# Altium PCB Lipo_Solar_Charger.PcbDoc
Units mil, origin at the board's own origin, x right, y up, seen from the top; angles counter-clockwise.
Board outline 1653.54 x 1653.54 mil, 2 copper layers (Top Layer, Bottom Layer); 28 components, 18 nets, 77 pads, 84 vias.
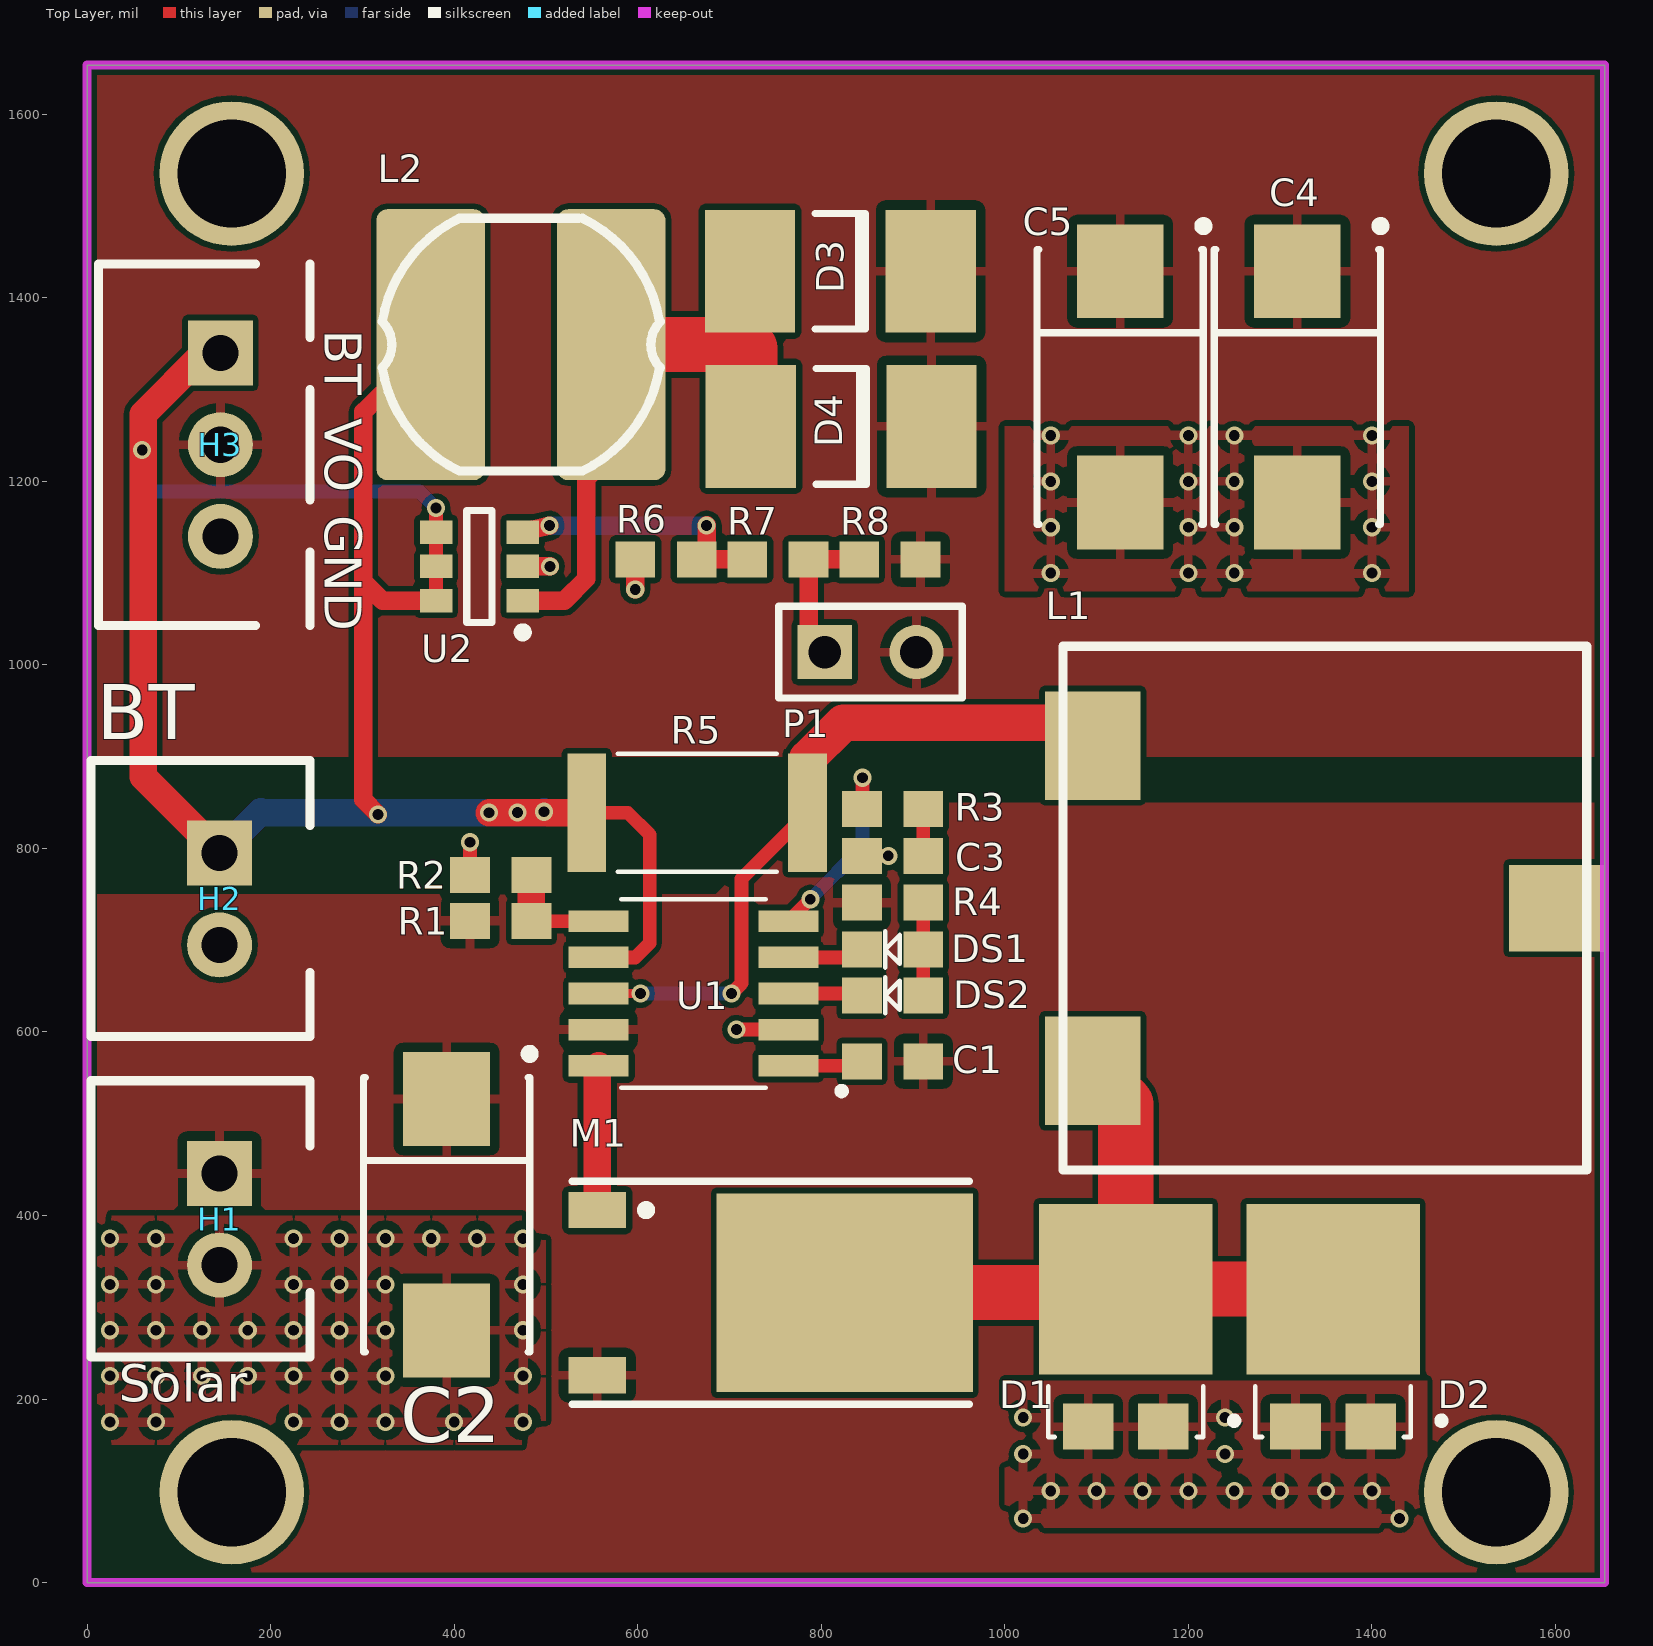
[diagram p0: Top Layer view]
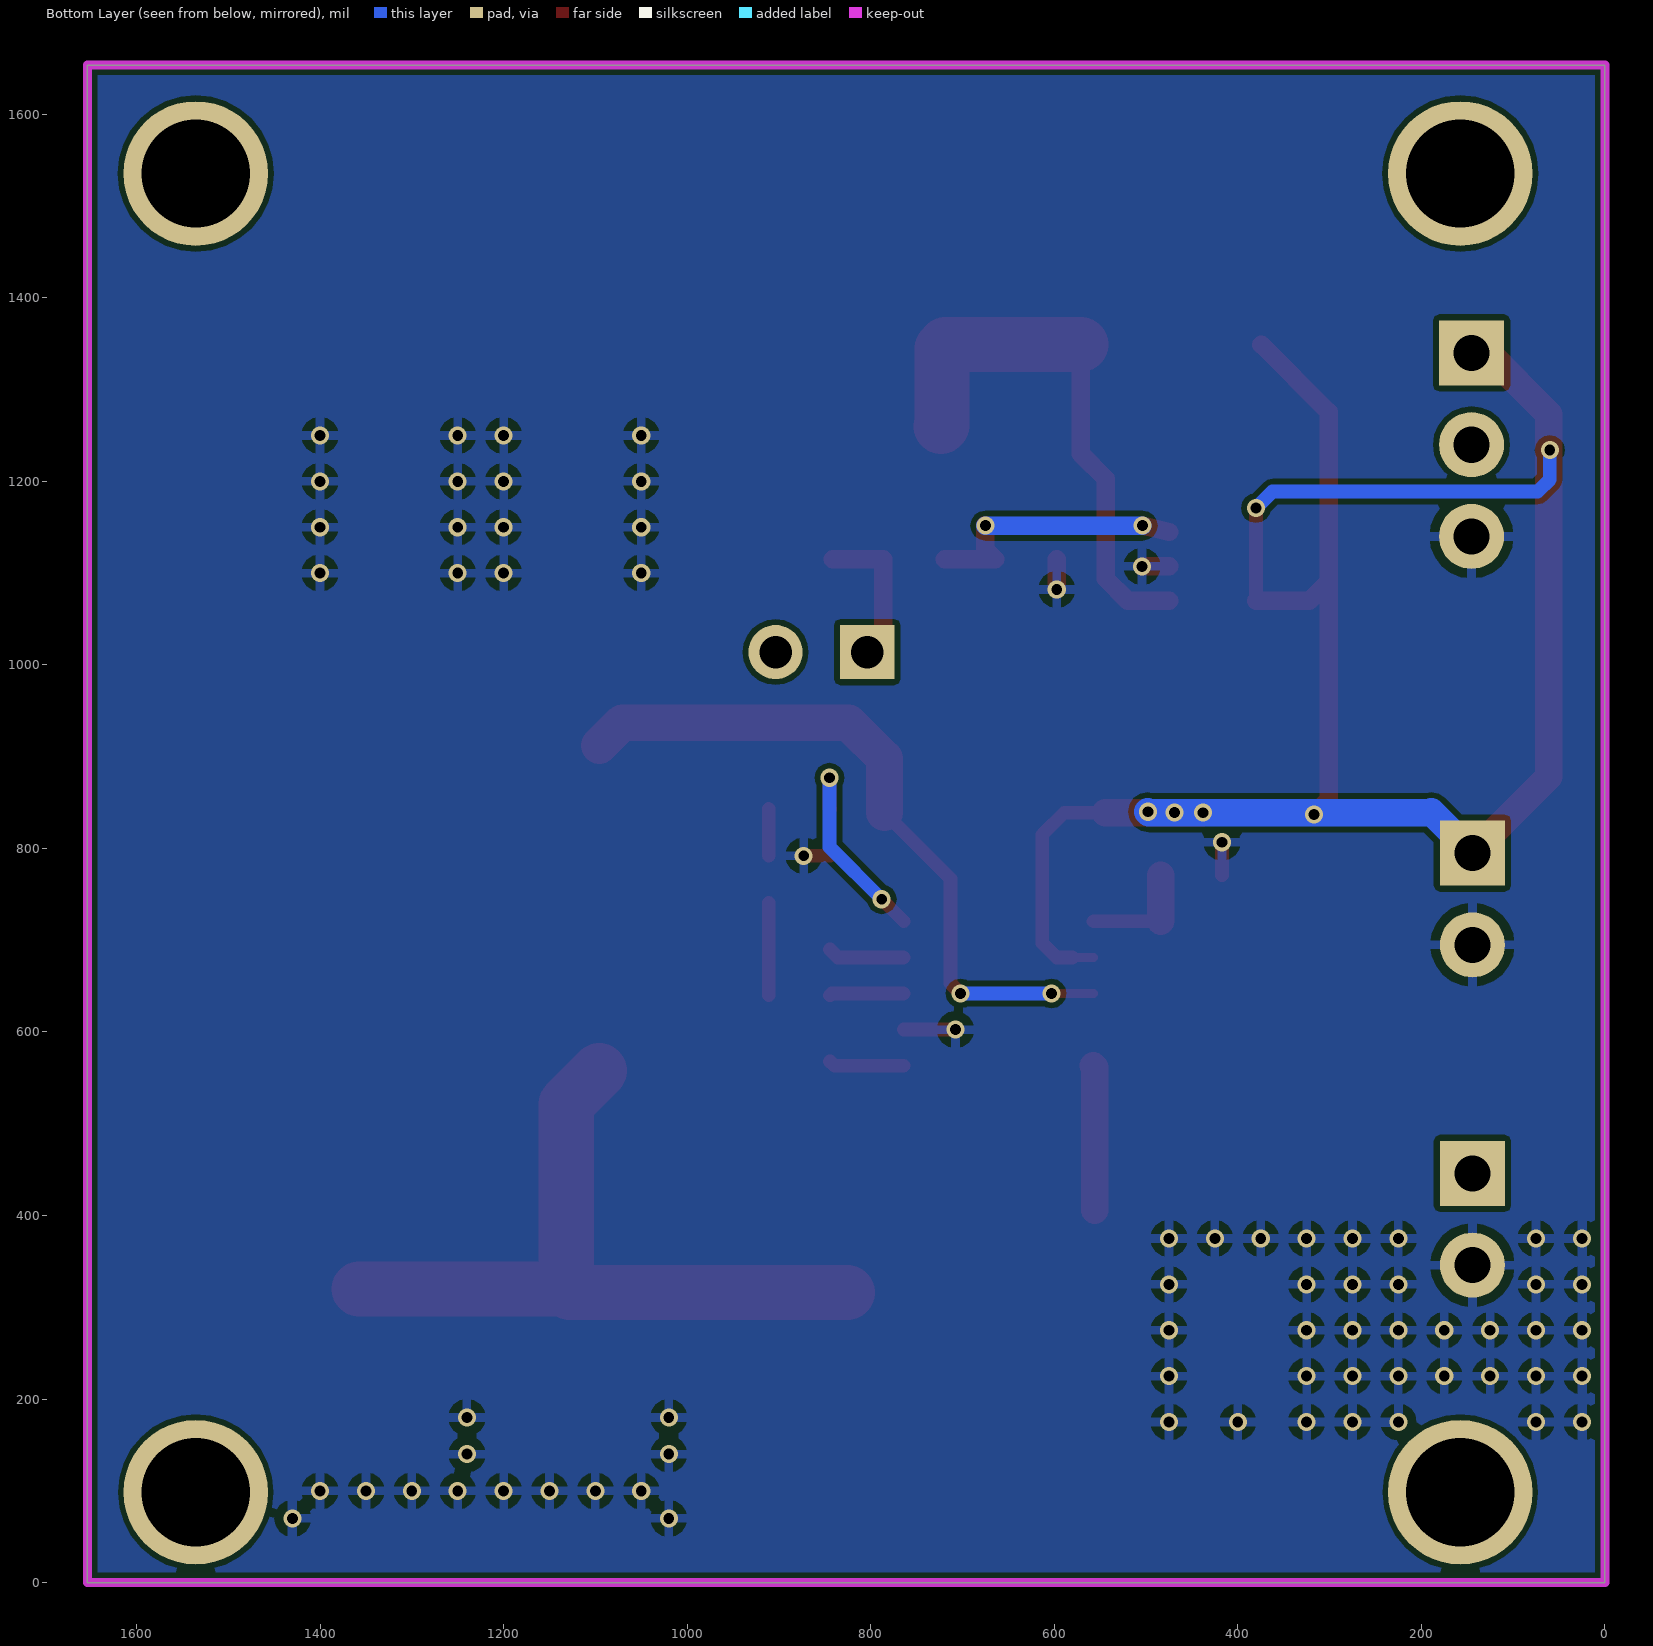
[diagram p1: Bottom Layer view, seen from below]
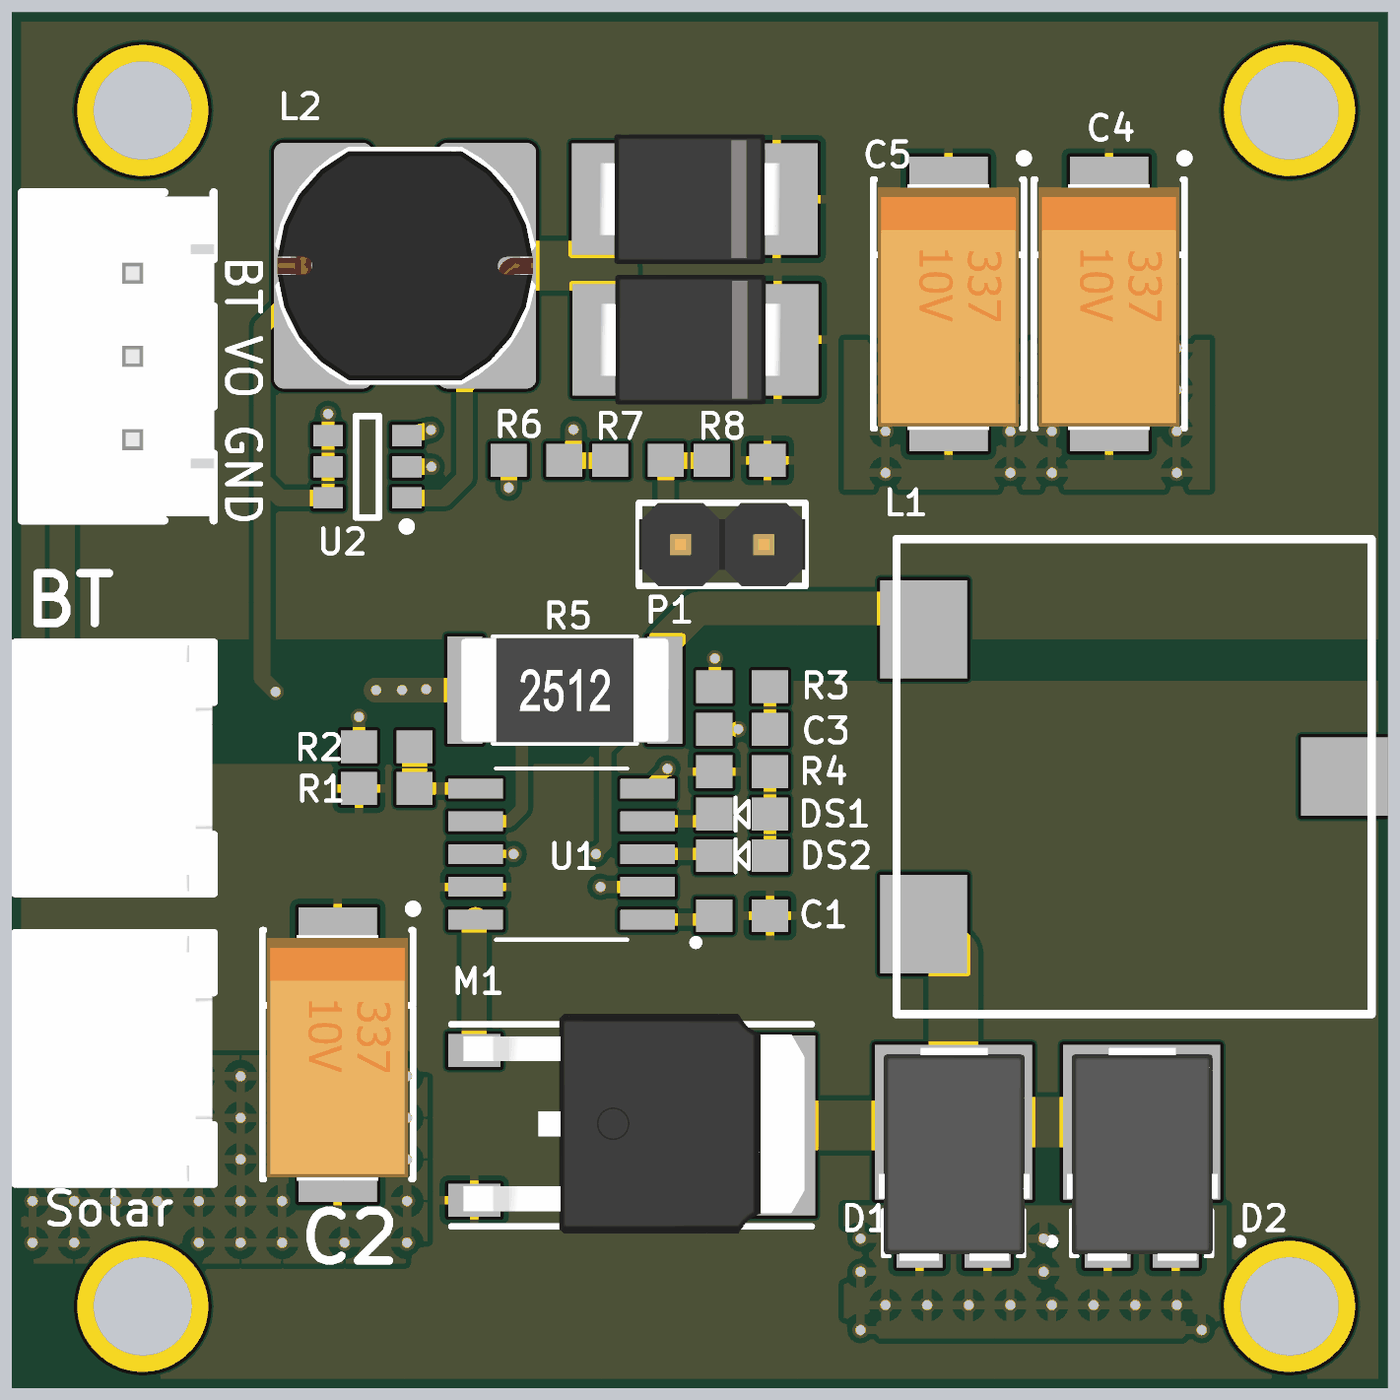
[diagram p2: 3D render of the assembled board from above, using the file's embedded part models]

## Layer stack, top to bottom
Top Solder: solder mask 0.4, Solder Resist, Dk 3.5
Top Layer: signal copper 1.4
Dielectric 1: dielectric 12.6, FR-4, Dk 4.8
Bottom Layer: signal copper 1.4
Bottom Solder: solder mask 0.4, Solder Resist, Dk 3.5

## Board outline
0,0 0,1653.54 1653.54,1653.54 1653.54,0

## Design rules (kind name [scope] priority, off if disabled: settings)
Clearance [All] p1: gap=6 ignorepadtopadclearanceinfootprint=FALSE
PolygonConnect [All] p1: connectstyle=Relief reliefconductorwidth=10 reliefentries=4 polygonreliefangle="90 Angle" airgapwidth=10
RoutingVias [All] p1: holewidth=28 width=50 viastyle="Through Hole" minholewidth=28 minwidth=50 maxholewidth=28 maxwidth=50
SolderMaskExpansion [All] p1: expansion=4
Width [All] p1: maxlimit=60 minlimit=6 preferedwidth=15
30 further rules are at their usual default settings.

## Components (designator, comment, footprint, x,y, rotation, side; value= is the part's Value field where it differs from the comment)
C1 "100nF" 0603 877.69,567.94 r0 top
C2 "16V 100uF" "7343 Tantalum Capacitor" 391.69,400.94 r270 top
C3 "220nF" 0603 877.69,791.94 r0 top
C4 "16V 100uF" "7343 Tantalum Capacitor" 1318.69,1302.94 r270 top
C5 "16V 100uF" "7343 Tantalum Capacitor" 1125.69,1302.94 r270 top
D1 "SB1045" TO-277 1131.75,278.8 r0 top
D2 "SB1045" TO-277 1357.64,278.8 r0 top
D3 "SS24" "SMD Diode SMB" 820.69,1428.94 r0 top
D4 "SS24" "SMD Diode SMB" 821.69,1259.94 r0 top
DS1 "LED" 0603_LED 877.69,689.94 r180 top
DS2 "LED" 0603_LED 877.69,639.94 r180 top
H1 "Solar" "XH2.54 2P" 144.32,395.94 r270 top
H2 "BT" "XH2.54 2P" 144.32,744.94 r270 top
H3 "XT2.54 3P" "XH2.54 3P" 145.31,1239.94 r270 top
L1 "12uH" CDEP147 1348.69,734.94 r180 top
L2 "10uH" CD75 472.69,1348.94 r90 top
M1 "AOD4185" TO-252AA 690.69,315.94 r270 top
P1 "12V/5V" HDR1X2 803.69,1013.94 r0 top
R1 "178kΩ" 1608[0603] 450.69,720.94 r180 top
R2 "45.3kΩ" 1608[0603] 450.69,770.94 r0 top
R3 "120Ω" 1608[0603] 877.69,842.94 r180 top
R4 "2kΩ" 1608[0603] 877.69,740.94 r180 top
R5 "40mΩ" 2512[6432] 664.69,838.94 r0 top
R6 "15kΩ" 1608[0603] 630.69,1114.94 r0 top
R7 "110kΩ" 1608[0603] 752.69,1114.94 r0 top
R8 "178kΩ" 1608[0603] 874.69,1114.94 r0 top
U1 "CN3791" SOIC100P600X175-10N 660.69,641.94 r180 top
U2 "MT3608" SOT23-6_L 427.45,1107.35 r180 top

## Footprints (in the part's own frame and the unit in brackets; to place one, negate y for a bottom-side part, rotate by r counter-clockwise, add the part's x,y. Pads: shape width x height; smd on the part's side, far side on the other; paste and mask are expansions set on the pad)
0603 [mm]
  rect 1.1x1 smd: 1(-0.85,0) 2(0.85,0)
  body extent -0.95,-0.4 0.95,0.4, height 0.5
0603_LED [mm]
  rect 1.1x1 smd: 1(-0.85,0) 2(0.85,0)
  silkscreen extent -0.2,-0.5 0.2,0.5, body extent -0.95,-0.4 0.95,0.4, height 0.5
1608[0603] [mm] "Chip Capacitor; Body 1.6 x 0.8 mm (LxW typ)"
  rect 1.1x1 smd: 1(-0.85,0) 2(0.85,0)
  body extent -0.95,-0.4 0.95,0.4, height 0.5
2512[6432] [mm]
  rect 1.07x3.27 smd: 1(-3.055,0) 2(3.055,0)
  silkscreen extent -2.2,-1.63 2.2,1.63, body extent -3.18,-1.59 3.17,1.59, height 0.62
"7343 Tantalum Capacitor" [mm] "Tantalum capacitor 2917 (7343 Metric)"
  rect 2.6x2.4 smd: 1(-3.2,0) 2(3.2,0)
  silkscreen extent -4.57,-2.3 3.8,2.43, body extent -3.66,-2.16 3.84,2.14, height 2.8
CD75 [mm]
  rrect20% 7.5x3 smd: 1(0,2.5) 2(0,-2.5)
  silkscreen extent -3.5,-3.86 3.5,3.84, body extent -3.5,-3.9 3.5,3.9, height 4.98
CDEP147 [mm] "SMD Power Inductor"
  rect 2.65x3 smd: 1(6.425,4.5) 2(6.425,-4.5)
  rect 2.65x2.4 smd: 3(-6.425,0)
  silkscreen extent -7.25,-7.25 7.25,7.25
HDR1X2 [mm] "Connector; Header; 2 Position"
  rect 1.5x1.5 hole 0.9: 1(0,0)
  round 1.5 hole 0.9: 2(2.54,0)
  silkscreen extent -1.27,-1.27 3.81,1.27, body extent -1.27,-1.27 3.81,1.27, height 8.6
"SMD Diode SMB" [mm]
  rect 2.5x3.4 smd: 1(-2.5,0) 2(2.5,0)
  silkscreen extent -0.7,-1.6 0.7,1.6, body extent -2.95,-1.97 2.65,1.97, height 2.65
SOIC100P600X175-10N [mm]
  rect 1.66x0.6 smd: 1(-2.625,2) 2(-2.625,1) 3(-2.625,0) 4(-2.625,-1) 5(-2.625,-2) 6(2.625,-2) 7(2.625,-1) 8(2.625,0) 9(2.625,1) 10(2.625,2)
  silkscreen extent -4.2,-2.61 2,2.8
SOT23-6_L [mm] "SOT23, 6-Leads, Body 2.9x1.6mm, Pitch 0.95mm, Lead Span 2.7mm, IPC High Density"
  rect 0.9x0.65 smd: 1(-1.2,0.95) 2(-1.2,0) 3(-1.2,-0.95) 4(1.2,-0.95) 5(1.2,0) 6(1.2,0.95)
  silkscreen extent -1.33,-1.55 0.35,1.95, body extent -0.9,-1.55 0.9,1.55, height 1.45
TO-252AA [mm] "D-PAK/TO-252-AA; 3 Leads (1 Cropped); Body 10.4 (inc. leads) x 6.7 mm (LxW max)"
  rect 1x1.6 smd: 1(-2.285,-3.425) 3(2.285,-3.425)
  rect 5.5x7.1 smd: 2(0,3.425)
  silkscreen extent -3.09,-4.13 3.09,6.88, body extent -3.41,-3.76 3.31,6.66, height 2.39
TO-277 [mm]
  rect 1.4x1.27 smd: 1(-1.04,-2.765) 1(1.04,-2.765)
  rect 4.8x4.72 smd: 2(0,1.04)
  silkscreen extent -2.15,-3.05 3.1,-1.65, body extent -2.28,-3.19 2.32,3.31, height 1.2
"XH2.54 2P" [mm]
  rect 1.8x1.8 hole 1: 1(-1.27,0)
  round 1.8 hole 1: 2(1.27,0)
  silkscreen extent -3.84,-3.56 3.81,2.5, body extent -3.75,-3.45 3.75,2.45, height 7
"XH2.54 3P" [mm]
  rect 1.8x1.8 hole 1: 1(-2.54,0)
  round 1.8 hole 1: 2(0,0) 3(2.54,0)
  silkscreen extent -5,-3.37 5,2.47, body extent -4.88,-3.35 4.88,2.49, height 7.21

## Part data
C1 C3: library part cap2
C2 C4 C5: library part cap, "有極性電容"
D1 D2: "10.0A SCHOTTKY BARRIER RECTIFIER"
D3 D4: library part DIODE, "Schottky Rectifier"
H1 H2: library part "XH2.54 2P"
H3: library part "XH2.54 3P"
L1 L2: library part inductor_1
M1: "P-Channel Enhancement Mode Field Effect Transistor"
P1: library part "Header 2", "Header, 2-Pin", LatestRevisionDate=17-Jul-2002, LatestRevisionNote="Re-released for DXP Platform.", Publisher="Altium Limited"
R1 R2 R3 R4 R6 R7 R8: library part Res, "Resistor", LatestRevisionDate=17-Jul-2002, LatestRevisionNote="Re-released for DXP Platform.", PackageReference=AXIAL-0.3, Published=8-Jun-2000, Publisher="Altium Limited"
R5: library part Res, "R sense"
U1: "4A, Standalone Li-ion Battery Charger IC  With Photovoltaic Cell MPPT Function"
U2: "High Efficiency 1.2MHz  2A Step Up Converter"

## Free pads (board coordinates)
  round 157.48 hole 118.11: 1(157.48,1535.43) 2(1535.43,1535.43) 3(1535.43,98.43) 4(157.48,98.43)

## Via types
v1: diameter 19.68, hole 11.81, Top Layer to Bottom Layer, tented both sides, 84 vias

## Nets (pads, with @x,y where several pads share a name; then routed paths per layer and width w, separated by ;. In a path a pad name is that pad's centre, name@x,y a point inside that pad or via, vN(x,y) a via of type N, cw(c..) or ccw(c..) an arc to the next point about the centre after c; other vN are vias at no path point)
BAT: H2.1 H3.1 L2.1 R5.1 U1.7 U2.4 U2.5 U2.6 | length 2465.7
  Top Layer w10: U1.7 U1.7@580,681.32
  Top Layer w15: U2.6 U2.5 U2.4 v1(380.2,1170.8) ; R5.1 589.06,838.94 613,815 613,697 597.31,681.32 U1.7@580,681.32
  Top Layer w20: v1(317,837) 301,853 301,1091 ; L2.1 301,1275.68 301,1091 ; U2.6 322.06,1069.94 301,1091
  Top Layer w30: H2.1 61,878.27 61,1273 127.94,1339.94 H3.1 ; v1(437.94,838.94) R5.1
  Bottom Layer w15: v1(60,1234) 60,1202 73.12,1188.88 362.12,1188.88 v1(380.2,1170.8)
  Bottom Layer w30: H2.1 189.38,840 190.38,839 v1(469,839) 497,839 v1(498,840)
CSP: L1.2 R5.2 U1.8 | length 772.3
  Top Layer w10: U1.8 v1(603.06,641.94)
  Top Layer w15: v1(702,642) 713,653 713,766.98 R5.2
  Top Layer w40: R5.2 784.97,897.97 824,937 1070.85,937 L1.2
  Bottom Layer w15: v1(603.06,641.94) 603.11,642 v1(702,642)
DRV: M1.1 U1.10 | length 157.9
  Top Layer w30: M1.1 555.85,561.71 U1.10
GND: C2.2 C3.1 C4.2 C5.2 D1.1 D2.1 H1.2 H2.2 H3.3 R2.1 R6.1 U1.2 U2.2 | length 185.4
  Top Layer w15: R2.1 v1(417.23,806.77) ; v1(707.57,602.57) U1.2 ; C3.1 v1@874.94,791.94
  Top Layer w20: U2.2 v1(504.35,1107.35) ; v1(597.23,1082.23) R6.1
  other v1: 1020,70 1430,70 1050,100 1100,100 1150,100 1200,100 1250,100 1300,100 1350,100 1400,100 1020,140 1240,140 25,175 75,175 225,175 275,175 325,175 400,175 475,175 1020,180 1240,180 25,225 75,225 125,225 175,225 225,225 275,225 325,225 475,225 25,275 75,275 125,275 175,275 225,275 275,275 325,275 475,275 25,325 75,325 225,325 275,325 325,325 475,325 25,375 75,375 225,375 275,375 325,375 375,375 425,375 475,375 873,792 1050,1100 1200,1100 1250,1100 1400,1100 1050,1150 1200,1150 1250,1150 1400,1150 1050,1200 1200,1200 1250,1200 1400,1200 1050,1250 1200,1250 1250,1250 1400,1250
MPPT: R1.1 R2.2 U1.6 | length 123.3
  Top Layer w15: R1.1 484.42,720.69 U1.6
  Top Layer w30: R1.1 R2.2
NetC1_1: C1.1 U1.1 | length 82.2
  Top Layer w15: U1.1 839.49,563.2 C1.1
NetC3_2: C3.2 R3.1 | length 51
  Top Layer w15: C3.2 R3.1
NetD1_2: D1.2 D2.2 L1.1 M1.2 | length 786.6
  Top Layer w60: M1.2 1127.94,315.94 D1.2 ; L1.1 1131.75,521.77 D1.2 ; D2.2 D1.2
NetD3_1: D3.1 D4.1 L2.2 U2.1 | length 583.7
  Top Layer w20: U2.1 519.94,1069.94 544,1094 544,1203 571.12,1230.12 L2.2
  Top Layer w60: L2.2 718.27,1348.94 722.27,1344.94 722.27,1260.94 D4.1
NetDS1_1: DS1.1 DS2.1 R4.1 | length 101
  Top Layer w15: DS2.1 DS1.1 R4.1
NetDS1_2: DS1.2 U1.4 | length 83.8
  Top Layer w15: U1.4 835.6,681.32 DS1.2
NetDS2_2: DS2.2 U1.3 | length 81
  Top Layer w15: U1.3 842.23,641.94 DS2.2
NetH4_1: 
NetP1_1: P1.1 R7.2 R8.1 | length 163.3
  Top Layer w20: P1.1 786.16,1031.48 R7.2 R8.1
NetR3_2: R3.2 U1.5 | length 224.2
  Top Layer w15: U1.5 v1(788,744.65) ; R3.2 845,843.72 v1(845,877)
  Bottom Layer w15: v1(788,744.65) 845,801.65 v1(845,877)
NetR6_2: R6.2 R7.1 U2.3 | length 297.8
  Top Layer w20: U2.3 v1(503.75,1151.75) ; v1(675,1152) 675,1125.79 R6.2 R7.1
  Bottom Layer w20: v1(503.75,1151.75) v1@675,1151.75
Vi: C1.2 C2.1 H1.1 M1.3 R1.2 R4.2 U1.9
Vout: C4.1 C5.1 D3.2 D4.2 H3.2 P1.2 R8.2
pads on no net: L1.3

## Polygon pours and split planes (outlines as drawn)
Vout on Top Layer "Top Layer-No Net" (solid, remove dead copper, pour order 8): -25,1675 1700,1675 1675,1650 1675,900 -25,900 -50,925
Vi on Top Layer "Top Layer-No Net" (solid, remove dead copper, pour order 6): 0,575 0,750 684.97,750 784.97,850 1800,850 1800,-50 1825,-75 -150,-75
GND on Top Layer "Top Layer-No Net" (solid, pour order 4): 0,400 500,400 500,150 0,150
GND on Top Layer "Top Layer-No Net" (solid, pour order 2): 1000,220 1460,220 1460,60 1000,60
GND on Top Layer "Top Layer-No Net" (solid, pour order 0): 1000,1260 1440,1260 1440,1080 1000,1080
GND on Bottom Layer "Top Layer-No Net" (solid, remove dead copper, pour order 10): -50,1700 1700,1700 1700,-150 1600,-50 -50,-50

## Keep-outs
Keep-Out Layer:
  lines w10: 0,0 0,236.22 0,1653.54 1653.54,1653.54 1653.54,0 0,0

## Silkscreen, mask and mechanical layers (free items; w line width, h text height)
Top Overlay:
  text "BT" at 259,1365 h40 r270
  text "VO" at 259,1269 h40 r270
  text "GND" at 259,1163 h40 r270